# Altium PCB scm_temp_pcb(AD10).PcbDoc
Units mil, origin at the board's own origin, x right, y up, seen from the top; angles counter-clockwise.
Board outline 2362.2 x 677.17 mil, 2 copper layers (Top Layer, Bottom Layer); 37 components, 30 nets, 137 pads, 75 vias.
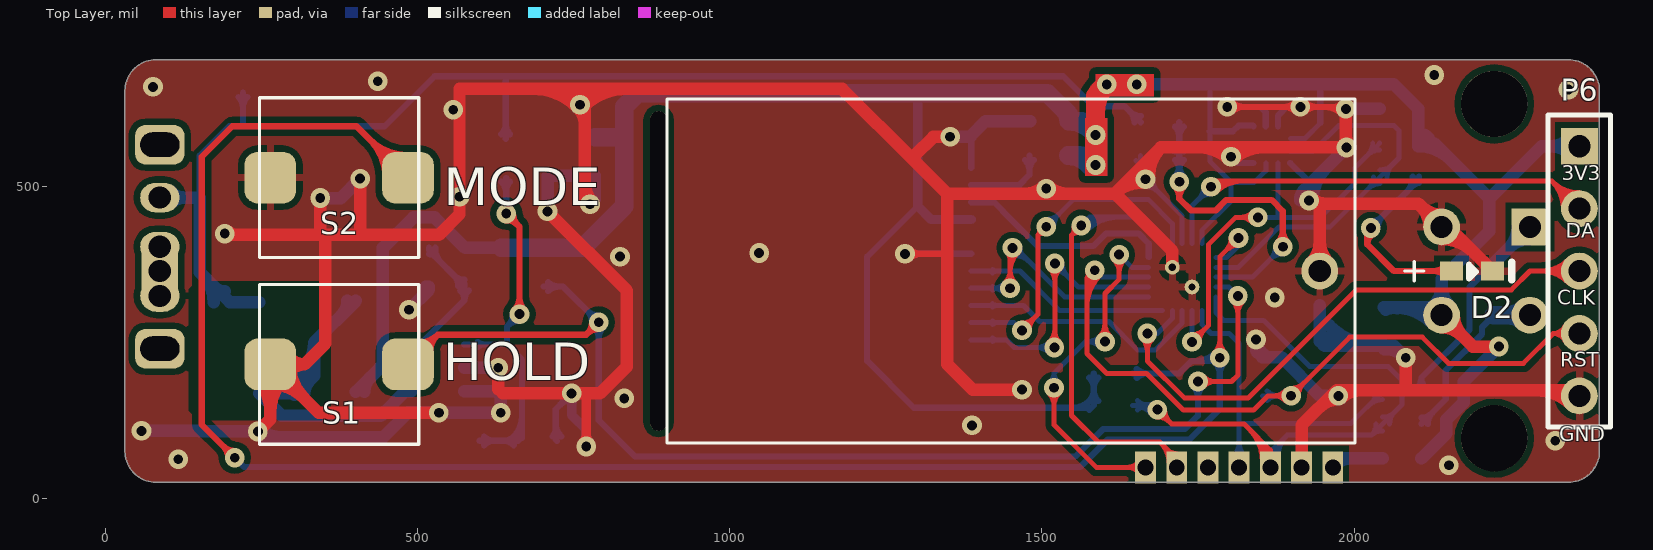
[diagram p0: Top Layer view]
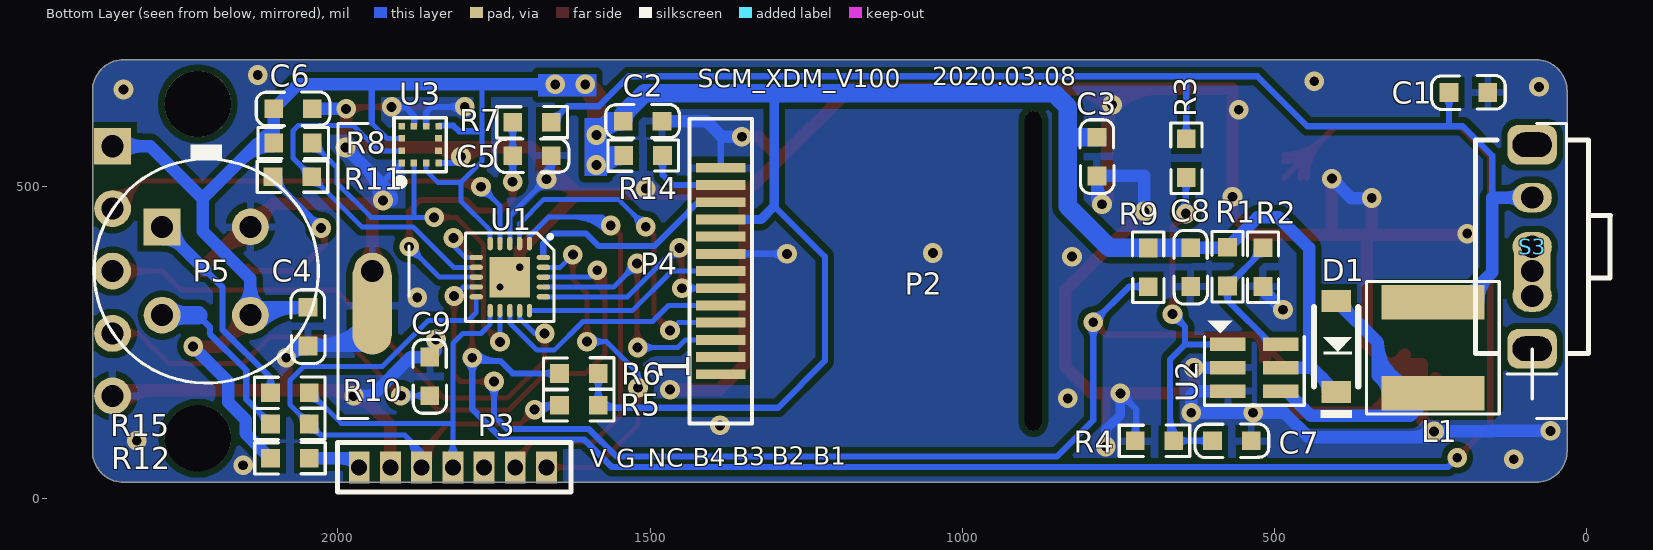
[diagram p1: Bottom Layer view, seen from below]

## Layer stack, top to bottom
Top Layer: signal copper 1.4
Dielectric: dielectric 12.6, FR-4, Dk 4.8
Bottom Layer: signal copper 1.4

## Board outline
31,75.42 ccw(c81,75.42) 81,25.42 2343.2,25.42 ccw(c2343.2,75.42) 2393.2,75.42 2393.2,652.58 ccw(c2343.2,652.58) 2343.2,702.58 81,702.58 ccw(c81,652.58) 31,652.58

## Design rules (kind name [scope] priority, off if disabled: settings)
Clearance ANTROOM [WithinRoom('ANT_ROOM') vs InNamedPolygon('TOP_GND')] p1: gap=15
Clearance ARC [ISARC] p2: gap=10
Clearance POLYGON_1 [InNamedPolygon('BOT_GND') Or  InNamedPolygon('TOP_GND')] p3: gap=10
Clearance PAD2PAD [ISPAD vs ISPAD] p4: gap=6
Clearance [All] p5: gap=7
ComponentClearance [All] p1 off: gap=10 collisioncheckmode=3 verticalgap=10 showdistances=FALSE
HoleSize [All] p1: absolutevalues=TRUE maxlimit=551.18 minlimit=1 maxpercent=80.000 minpercent=20.000
HoleToHoleClearance [All] p1 off: gap=10 allowstackedmicrovias=TRUE
MinimumSolderMaskSliver [All] p1 off: minsoldermaskwidth=10
PolygonConnect VIA [ISVIA] p1: connectstyle=Direct reliefconductorwidth=10 reliefentries=4 polygonreliefangle="90 Angle"
PolygonConnect [All] p2: connectstyle=Relief reliefconductorwidth=11.81 reliefentries=4 polygonreliefangle="90 Angle"
RoutingVias [All] p1: holewidth=11.81 width=23.62 viastyle="Through Hole" minholewidth=11.81 minwidth=23.62 maxholewidth=200 maxwidth=200
SilkToSilkClearance [All] p1 off: silktosilkclearance=10
SilkscreenOverComponentPads [IsPad] p1 off: minsilkscreentomaskgap=1
SolderMaskExpansion [All] p1: expansion=4
Width [All] p1: maxlimit=118.11 minlimit=7.87 preferedwidth=8
22 further rules are at their usual default settings.

## Components (designator, comment, footprint, x,y, rotation, side; value= is the part's Value field where it differs from the comment)
C1 "10uF/16V(X5R)" C0603 158,650 r0 bottom
C2 "10uF/16V(X5R)" C0603 1481,604 r0 bottom
C3 "10uF/16V(X5R)" C0603 784,516.31 r90 bottom
C4 "1uF/10V(X5R)" C0603 2048,306 r270 bottom
C5 "0.1uF/50V" C0603 1658.16,548.79 r0 bottom
C6 "1uF/16V/X7R" C0603 2041,623.84 r0 bottom
C7 "4.7uF/16V" C0603 537,92 r0 bottom
C8 "10uF/10V/X7R" C0603 634,339.17 r90 bottom
C9 "0.1uF/50V" C0603 1853,226.2 r270 bottom
D1 "1N5819HW" SOD-123 401,316.17 r270 bottom
D2 "LED_RED" D0603 2156,364 r0 top
L1 "SWPA5020S4R7MT(4.7uH)" SMD_L5X5 246,241.17 r270 bottom
P2 "Header 2" BAT_7S 1016,364 r0 bottom locked
P3 "PH1.27_1x7" PH1.27_7P 1666,49.59 r0 bottom
P4 "LCD" SMD_1X13_0.7 1386.75,364 r0 bottom locked
P5 "MLX90614" TO-39 2211,364 r180 bottom locked
P6 "PH2.54_1x5P" HDR1X5 2361,564 r270 top
R1 "1M" R0603 575,340 r90 bottom
R2 "680K" R0603 518,339.17 r90 bottom
R3 "10K" R0603 641,576 r270 bottom
R4 "510K" R0603 723,92 r180 bottom
R5 "10K" R0603 1583,148.94 r0 bottom
R6 "47K" R0603 1583,200 r0 bottom
R7 "1M" R0603 1720.16,602.27 r180 bottom
R8 "47K" R0603 2103,569 r180 bottom
R9 "47K" R0603 702,401 r270 bottom
R10 "33R" R0603 2046,169 r0 bottom
R11 "10K" R0603 2104,515 r180 bottom
R12 "120R" R0603 2108,64 r180 bottom
R14 "10R" R0603 1480,549 r0 bottom
R15 "33R" R0603 2046,119 r0 bottom
S1 "SW-PB" SMD_SW6X6- 374.19,214.39 r90 top locked
S2 "SW-PB" SMD_SW6X6- 374.19,513.61 r90 top locked
S3 "SK12D07VG3" SK12D07 86.87,403 r90 bottom
U1 "N76E003AQ20" QFN20 1724.75,354.25 r270 bottom
U2 "HX3002" SOT23-6 532,209 r270 bottom
U3 "NC" LGA-12 1898,537 r90 bottom

## Footprints (in the part's own frame and the unit in brackets; to place one, negate y for a bottom-side part, rotate by r counter-clockwise, add the part's x,y. Pads: shape width x height; smd on the part's side, far side on the other; paste and mask are expansions set on the pad)
BAT_7S [mm] "Connector; Header; 2 Position"
  rect 1.5x1.5 hole 0.9: 1(-23.6,0)
  round 1.5 hole 0.9: 2(23.6,0)
  silkscreen extent -25,-6 25,6
C0603 [mil]
  rect 30x30 smd: 1(0,0) 2(62,0)
  silkscreen extent -28,-27 90,27
D0603 [mil]
  rect 37x30 smd: 1(0,0) 2(66,0)
  silkscreen extent 28,-14 97,14
HDR1X5 [mm] "Connector; Header; 5 Position"
  rect 1.5x1.5 hole 0.9: 1(0,0)
  round 1.5 hole 0.9: 2(2.54,0) 3(5.08,0) 4(7.62,0) 5(10.16,0)
  silkscreen extent -1.27,-1.27 11.43,1.27
LGA-12 [mm]
  rect 0.275x0.265 smd mask+0.05: 1(0,0) 2(0,-0.5) 3(0,-1) 4(0,-1.5) 7(1.5,-1.502) 8(1.5,-1.002) 9(1.5,-0.502) 10(1.5,-0.002)
  rect 0.265x0.275 smd mask+0.05: 5(0.5,-1.5) 6(1,-1.5) 11(1,-0.002) 12(0.5,-0.002)
  silkscreen extent -0.86,-1.81 1.84,0.31
PH1.27_7P [mm]
  rect 0.85x1.3 hole 0.65: 1(0,0) 2(1.27,0) 3(2.54,0) 4(3.81,0) 5(5.08,0) 6(6.35,0) 7(7.62,0)
  silkscreen extent -1,-1 8.51,1
QFN20 [mm] "WFQFPN20,3x3mm"
  oval 0.55x0.22 smd mask+0.01: 1(-1.365,0.8) 2(-1.365,0.4) 3(-1.365,0) 4(-1.365,-0.4) 5(-1.365,-0.8) 11(1.365,-0.8) 12(1.365,-0.4) 13(1.365,0) 14(1.365,0.4) 15(1.365,0.8)
  oval 0.22x0.55 smd mask+0.01: 6(-0.8,-1.365) 7(-0.4,-1.365) 8(0,-1.365) 9(0.4,-1.365) 10(0.8,-1.365) 16(0.8,1.365) 17(0.4,1.365) 18(0,1.365) 19(-0.4,1.365) 20(-0.8,1.365)
  round 0.6 hole 0.3: P(-0.4,0.4) P(0.4,-0.4)
  rect 1.65x1.65 smd paste+0 mask+0.05: P(0,0)
  silkscreen extent -1.8,-1.8 1.8,1.8
R0603 [mil]
  rect 30x30 smd: 1(0,0) 2(62,0)
  silkscreen extent -25,-25 88,25
SK12D07 [mm]
  oval 1.3x1.6 hole 0.9: 1(-2,0)
  oval 1.2x1.6 hole 0.9: 2(0,0) 3(2,0)
  rrect50% 1.6x2 hole 1 slot 1.6 at 90 deg: S1(-4.15,0) S2(4.15,0)
  silkscreen extent -4.35,-3.19 4.35,2.3
SMD_1X13_0.7 [mm]
  rect 2x0.4 smd paste+0 mask+0.05: 1(0,4.2) 2(0,3.5) 3(0,2.8) 4(0,2.1) 5(0,1.4) 6(0,0.7) 7(0,0) 8(0,-0.7) 9(0,-1.4) 10(0,-2.1) 11(0,-2.8) 12(0,-3.5) 13(0,-4.2)
  silkscreen extent -1.27,-6.2 1.27,6.2
SMD_L5X5 [mm]
  rect 1.4x4.2 smd: 1(-1.85,0) 2(1.85,0)
  silkscreen extent -2.7,-2.7 2.7,2.7
SMD_SW6X6- [mm]
  rrect50% 2.1x2.1 smd: 1(0,2.8) 2(0,-2.8)
  silkscreen extent -3.25,-3.24 3.25,3.24
SOD-123 [mm] "SOD123"
  rect 0.9x1.2 smd: 1(0,0) 2(3.7,0)
  silkscreen extent 0.26,-0.9 4.77,0.9
SOT23-6 [mm] "SOT-23/SC-74A; 5 Leads; Body 3.1 x 3 mm, inc. leads (LxW max)"
  rect 0.55x1.45 smd: 1(-0.95,-1.075) 2(0,-1.075) 3(0.95,-1.075) 4(0.95,1.075) 5(0,1.075) 6(-0.95,1.075)
  silkscreen extent -1.91,-2.03 1.52,2.03
TO-39 [mm] "Connector; Header; 2 Position"
  rect 1.5x1.5 hole 0.9: 1(-1.796,1.796)
  round 1.5 hole 0.9: 2(-1.796,-1.796) 3(1.796,-1.796) 4(1.796,1.796)
  silkscreen extent -4.56,-4.56 4.56,5.08

## Part data
C1 C2 C3 C4 C5 C9: library part Cap, "Capacitor"
C6 C7 C8: library part "Cap 1206", "Capacitor 1206"
D1: library part "D Schottky", "DIODES SOD-123"
D2: library part LED3
L1: library part Inductor, "Inductor"
P2: "Header, 2-Pin"
P3: library part "Header 7", "Header, 7-Pin"
P4: library part "Header 13", "Header, 13-Pin"
P5: library part "Header 4", "Header, 4-Pin"
P6: library part "Header 5", "Header, 5-Pin"
R1 R2 R3 R4 R5 R6 R7 R8 R9 R10 R11 R12 R14 R15: library part Res2, "Resistor"
S1 S2: "Switch"
S3: library part SW-SPDT, "SPDT Subminiature Toggle Switch, Right Angle Mounting, Vertical Actuation"
U3: library part CC101

## Free pads (board coordinates)
  oval 27.56x511.81 hole 27.56 slot 511.81 at 90 deg unplated: 0(886,364)
  round 106.3 hole 106.3: 0(2224.58,96.28) 0(2224.58,631.72)
  oval 62.99x157.48 smd far side: 1(1945.13,308.88)

## Via types
v1: diameter 31.5, hole 15.75, Top Layer to Bottom Layer, tented both sides, 75 vias

## Nets (pads, with @x,y where several pads share a name; then routed paths per layer and width w, separated by ;. In a path a pad name is that pad's centre, name@x,y a point inside that pad or via, vN(x,y) a via of type N, cw(c..) or ccw(c..) an arc to the next point about the centre after c; other vN are vias at no path point)
3V0: C2.2 C3.2 C4.1 C6.2 C8.2 D1.2 P4.10 P5.3 P6.1 R1.2 R5.1 R6.1 R8.1 R9.1 R12.1 R14.2 U1.5 U2.5 U3.3 U3.7 U3.11 | length 5779.4
  Top Layer w20: P5.3@2140.29,273.76 cw(c2140.29,226.62) 2173.62,259.95 cw(c2206.96,293.29) P5.3@2159.82,293.29 ; P5.3 2190.58,243 v1(2232,243)
  Top Layer w30: v1(1586,582) 1586,645 v1(1604,663) ; 1586,617.74 cw(c1649.26,617.74) v1@1604.53,662.47 ; 1586,637.54 cw(c1611.91,637.54) v1@1604.22,662.29
  Bottom Layer w8: U1.5 1756.24,429.24 1803,476 1803,506 ; 1769,663 1769,588 1769,540 1803,506 ; U3.3 1858.63,524.63 1840,506 1803,506 ; U3.11 1921.37,576.37 1946,601
  Bottom Layer w10: 1301,468 1220,387 1220,220 1295,145 R5.1@1579,145 ; 1549.34,145 ccw(c1549.34,182.6) 1575.93,156.01 ccw(c1558.86,173.08) 1583,173.08 ccw(c1607.14,173.08) R5.1@1590.07,156.01 ; R5.1@1568.38,145 cw(c1568.38,134.32) R5.1@1575.93,141.87 ; R6.1@1575.93,192.93 cw(c1558.86,175.86) 1583,175.86 cw(c1607.14,175.86) R6.1@1590.07,192.93 ; R5.1 R6.1 ; 1769,588 1806,588 1815.03,597.03 1837.9,597.03 U3.7 ; 1946,601 1946,663
  Bottom Layer w15: 1301,649 1301,468 1322.32,446.68 P4.10
  Bottom Layer w20: D1.2 439.5,209 ; D1.2@414.62,170.5 cw(c447.51,170.5) 424.25,193.75 ; U2.5 439.5,209 ; C8.2 575.83,401.17 R1.2 527,450 493,450 444.13,401.13 444.13,213.63 439.5,209 ; v1(1652,663) 1769,663 1946,663 2063.84,663 C6.2 R8.1 2128,569 2217,480 ; C4.1 P5.3@2127.58,306 ; C4.1@2050.5,301.67 cw(c2062.92,280.15) 2069.36,304.15 ; C4.1@2062.46,306 cw(c2062.46,215.46) P5.3@2126.48,279.48 ; R8.1@2103,564 cw(c2103,491.57) 2154.21,542.79 ; 2103,584 cw(c2103,559.86) 2120.07,576.93 ; R12.1 2148,104 2148,126 2176,154 2176,187 v1(2232,243) ; 2110.74,306 cw(c2110.74,263.74) P5.3@2140.62,293.62 ; P5.3@2126.48,307.1 ccw(c2093.15,340.43) 2140.29,340.43 ccw(c2187.43,340.43) P5.3@2154.1,307.1 ; P5.3 2140.29,351.29 2217,428 2217,480 ; P6.1@2347.19,550.19 ccw(c2313.86,516.86) 2313.86,564 ccw(c2313.86,611.14) P6.1@2347.19,577.81 ; P6.1 2301,564 2217,480
  Bottom Layer w30: C8.2 764.17,401.17 831,468 831,627.18 852.82,649 1301,649 1509,649 1543,615 C2.2 ; C3.2 830.31,578.31 ; 1535.22,622.78 cw(c1516.44,604) C2.2 ; R14.2@1547.98,549 cw(c1547.98,495.98) v1@1585.47,533.47 ; 1565.77,543.13 ccw(c1586,563.35) v1@1586,534.75 ; v1@1572.56,536.34 ccw(c1542,505.79) R14.2 1559.9,549 ; v1@1578.85,589.15 ccw(c1543,553.3) C2.2 ; v1@1585.34,533.65 ccw(c1559.9,520.25) 1559.9,549 ; v1(1586,534) 1574.9,534 1559.9,549 ; v1(1586,582) 1564,604 C2.2
BAT+: P2.1 S3.1 S3.2 | length 260.2
  Bottom Layer w20: P2.1@73.06,350.19 cw(c39.72,316.86) 86.87,316.86 cw(c134.01,316.86) P2.1@100.67,350.19 ; P2.1@75.84,335.28 ccw(c49.23,361.9) 86.87,361.9 ccw(c124.51,361.9) P2.1@97.89,335.28 ; P2.1@77.23,393.37 cw(c53.98,370.11) 86.87,370.11 cw(c119.75,370.11) P2.1@96.5,393.37 ; P2.1@86.87,389 P2.1 86.87,315 S3.1@87.87,314
BAT_ADC: C5.2 R7.1 U1.8 | length 774.9
  Top Layer w10: v1@1712.56,499.56 cw(c1694.21,481.21) 1720.16,481.21 cw(c1746.11,481.21) v1@1727.76,499.56 ; v1(1720.16,507.16) 1720.16,479.84 1739,461 1778.5,461 1795.5,478 1868,478 1886,460 v1@1886,404 ; v1@1878.4,410.6 ccw(c1860.05,428.95) 1886,428.95 ccw(c1911.95,428.95) v1@1893.6,410.6
  Bottom Layer w8: U1.8 1837.25,354.25 v1(1886,403) ; v1@1874.25,403 cw(c1845.89,403) 1865.94,382.94 cw(c1886,362.89) v1@1886,391.25
  Bottom Layer w10: v1@1712.56,514.76 ccw(c1694.21,533.11) 1720.16,533.11 ccw(c1746.11,533.11) v1@1727.76,514.76 ; C5.2@1713.09,541.72 cw(c1696.02,524.65) 1720.16,524.65 cw(c1744.3,524.65) C5.2@1727.23,541.72 ; C5.2@1713.09,555.86 ccw(c1696.02,572.93) 1720.16,572.93 ccw(c1744.3,572.93) C5.2@1727.23,555.86 ; R7.1@1713.09,595.2 cw(c1696.02,578.13) 1720.16,578.13 cw(c1744.3,578.13) R7.1@1727.23,595.2 ; v1(1720.16,507.16) C5.2 R7.1
CS: P4.7 U1.15 | length 347.5
  Bottom Layer w8: P4.7 1465,364 1528.49,300.51 U1.15 ; P4.7@1420.98,361.26 cw(c1427.6,354.65) 1427.6,364 cw(c1427.6,373.35) P4.7@1420.98,366.74
CX: R11.2 U1.7 U3.12 | length 687.5
  Bottom Layer w8: U1.7 1815,370 1879.71,434.71 1961.71,434.71 R11.2 2072,545 2072,589 2064,597 1975,597 1934.69,556.68 U3.12 ; R11.2@2031,515 cw(c2004.44,515) 2023.22,496.22 cw(c2042,477.44) R11.2@2042,504 ; R11.2@2042,526 ccw(c2042,552.56) 2060.78,533.78 ccw(c2079.56,515) R11.2@2053,515
DX: R8.2 U1.12 U3.2 | length 791.6
  Top Layer w7.87: v1(1740.5,250.5) 1767,277 1767,406.74 1810.26,450 v1(1845.95,450) ; v1@1740.5,262.31 ccw(c1740.5,290.82) 1760.66,270.66 ccw(c1780.82,250.5) v1@1752.31,250.5 ; v1@1837.6,441.65 ccw(c1817.44,421.49) 1817.44,450 ccw(c1817.44,478.51) v1@1837.6,458.35
  Bottom Layer w7.87: v1(1740.5,250.5) U1.12 ; v1(1845.95,450) 1878.31,450 ; U3.2 1878.31,450 ; R8.2@2029.94,569 cw(c2003.23,569) 2022.11,550.11 cw(c2041,531.23) R8.2@2041,557.94 ; R8.2 2001.5,529.5 2001.5,504.5 1947,450 1878.31,450
GND: C1.1 C2.1 C3.1 C4.2 C5.1 C6.1 C7.1 C8.1 C9.1 D2.2 P2.2 P3.6 P4.8 P4.13 P5.4 P6.5 pad.1 R2.1 R4.1 S1.1 S2.1 U1.3 U1.P U2.2 U2.3 U3.1 U3.4 U3.8 U3.9 | length 10612.3
  Top Layer w10: v1(1280.56,391.56) 1346.56,391.56 ; v1@1288.16,383.96 cw(c1306.51,365.61) 1306.51,391.56 cw(c1306.51,417.51) v1@1288.16,399.16 ; v1(1797,627) v1(1914,627) v1@1983.84,627 ; v1@1804.6,619.4 cw(c1822.95,601.05) 1822.95,627 cw(c1822.95,652.95) v1@1804.6,634.6 ; v1@1906.4,619.4 ccw(c1888.05,601.05) 1888.05,627 ccw(c1888.05,652.95) v1@1906.4,634.6 ; v1@1921.6,619.4 cw(c1939.95,601.05) 1939.95,627 cw(c1939.95,652.95) v1@1921.6,634.6 ; 1953.43,627 cw(c1953.43,590.27) v1@1979.4,616.24 ; 1968.67,627 ccw(c1968.67,642.17) v1@1979.4,631.44
  Top Layer w15: v1@764.17,88.83 ccw(c750.09,102.91) 770,102.91 ccw(c789.91,102.91) v1@775.83,88.83 ; v1(770,83) 770,166
  Top Layer w20: v1@193,422 352,422 ; v1@195.06,428.06 ccw(c209.71,442.71) 209.71,422 ; S1.1@241.79,192.23 cw(c188.29,138.74) 263.95,138.74 cw(c339.61,138.74) S1.1@286.11,192.23 ; v1(244,107) 263.95,126.95 S1.1 ; S1.1@263.95,183.06 cw(c263.95,107.4) 317.45,160.9 cw(c370.95,214.39) S1.1@295.29,214.39 ; S1.1@291.05,198.66 cw(c318.39,182.78) 318.39,214.39 ; S1.1@291.05,230.13 ccw(c318.39,246.01) 318.39,214.39 ; 344,423 v1(344,481) ; 407.83,422.83 v1(407.83,512) ; v1(534,137) 341.35,137 S1.1 ; 567,655 v1(567,483) 567,455 534,422 352,422 ; 567,656 1180,656 1296,540 ; 629,175 v1(629,209) ; 636,168 v1(746.59,168) 792,168 835,211 835,332.52 v1(708,459.52) ; 684.56,656 cw(c684.56,555.06) 755.94,626.44 cw(c726.81,597.31) 768,597.31 ; 732.84,656 cw(c732.84,603.34) v1@770.08,640.58 ; v1@749.92,640.58 cw(c787.16,603.34) 787.16,656 ; v1@757.01,635.41 ccw(c745.05,655) 768,655 v1@768,479 ; v1@764.06,626.44 cw(c835.44,555.06) 835.44,656 ; 768,504.19 ccw(c809.19,504.19) v1@780.06,475.06 ; v1(1353,579) 1326,579 1296,549 1296,540 ; v1(1468,174) 1389,174 1348,215 1348,488 ; 1473.85,488 ccw(c1473.85,529.19) v1@1502.98,500.06 ; v1@1511.11,500.06 ccw(c1540.24,529.19) 1540.24,488 ; 1646.47,517.72 cw(c1664.8,499.39) v1@1667.46,525.18 ; v1@1651.78,510.05 cw(c1678.59,511.84) 1659.59,530.84 ; v1@1665.41,505.28 ccw(c1659.24,445.52) 1616.75,488 ; v1@1671.74,511.38 cw(c1737,515.75) 1690.75,562 ; U1.P@1709,370 1709,395.75 1616.75,488 ; 1752.91,562 cw(c1752.91,496.91) v1@1798.94,542.94 ; v1@1807.06,542.94 cw(c1853.09,496.91) 1853.09,562 ; P3.6 1916,117 1972,173 2352,173 P6.5 ; P2.2@1931.33,377.81 ccw(c1897.99,411.14) 1945.13,411.14 ccw(c1992.28,411.14) P2.2@1958.94,377.81 ; v1@1932.06,481.06 ccw(c1953.95,502.95) 1953.95,472 ; v1@1933.18,479.5 ccw(c1945.13,485.28) 1945.13,472 ; 1944.7,145.7 cw(c1975,115.4) v1@1975,158.25 ; P2.2 1945.13,472 ; v1@1979.06,159.94 cw(c2010.6,128.4) 2010.6,173 ; v1@1987,563 v1(1987,623.84) ; 1987,578.29 ccw(c2004.29,578.29) v1@1992.06,566.06 ; v1(1988,562) 1690.75,562 ; 2083,174 v1(2083,225) ; P5.4@2120.76,434.71 ccw(c2073.62,434.71) 2106.95,468.05 ccw(c2140.29,501.38) P5.4@2140.29,454.24 ; P5.4@2140.29,415.18 cw(c2140.29,341.48) 2192.4,393.6 ; P5.4 2103,472 1945.13,472 ; P5.4@2151.29,434.71 D2.2 ; D2.2@2207.49,378.51 cw(c2192.98,364) D2.2@2213.5,364 ; 2292.13,173 cw(c2292.13,95.13) P6.5@2347.19,150.19 ; S1.1 318.39,214.39 ; 318.39,214.39 352,248 352,422 ; 1296,540 1348,488 ; 1348,488 1616.75,488 ; 1616.75,488 1690.75,562
  Bottom Layer w8: C5.1@1650.38,541.01 cw(c1631.6,522.23) 1658.16,522.23 cw(c1684.71,522.23) C5.1@1665.94,541.01 ; v1@1655.83,516.87 ccw(c1645.07,523.09) 1657.07,526.3 ; 1656.89,526.98 ccw(c1675.5,531.97) v1@1667.55,514.41 ; 1658.16,533.36 ccw(c1681.76,533.36) v1@1668.16,514.06 ; v1@1666,499.25 cw(c1666,470.89) 1686.06,490.94 cw(c1706.11,511) v1@1677.75,511 ; v1@1672.77,520.6 cw(c1692.65,548.79) C5.1 1658.16,518.84 v1(1666,511) 1724.75,452.25 U1.3
  Bottom Layer w10: R4.1@715.93,99.07 ccw(c703.69,111.31) 721,111.31 ; 721,120.97 ccw(c751.97,120.97) R4.1@730.07,99.07 ; R4.1 721,94 721,142.41 v1(746.59,168) ; v1@735.84,168 cw(c709.89,168) 728.24,149.65 cw(c746.59,131.3) v1@746.59,157.25 ; v1(1280.56,391.56) P4.8 ; v1@1288.16,383.96 cw(c1306.51,365.61) 1306.51,391.56 cw(c1306.51,417.51) v1@1288.16,399.16 ; P4.13 1386.75,580.75 ; v1(1797,627) 1850,627 1858.56,618.44 U3.8 ; v1@1804.6,619.4 cw(c1822.95,601.05) 1822.95,627 cw(c1822.95,652.95) v1@1804.6,634.6 ; v1@1813,537 U3.4 ; U3.9 1878.24,613 1892.24,627 ; U3.1 1928,507 1928,502 ; v1@1905.46,620.47 ccw(c1892.24,610.35) 1892.24,627 ; v1@1905.46,633.53 cw(c1892.24,643.65) 1892.24,627 ; v1(1914,627) 1892.24,627
  Bottom Layer w15: v1@740.76,162.17 cw(c726.68,148.09) 746.59,148.09 cw(c766.5,148.09) v1@752.42,162.17 ; v1(746.59,168) 746.59,133.41 770,110 v1(770,83) ; v1@764.17,88.83 ccw(c750.09,102.91) 770,102.91 ccw(c789.91,102.91) v1@775.83,88.83
  Bottom Layer w20: v1(57.66,108) 150.03,108 151.03,107 v1(244,107) ; v1@248.06,111.06 ccw(c279.6,142.6) 279.6,98 ; v1@253,98 445.18,98 484.18,137 v1(534,137) v1(633,137) 633,165 626.4,171.6 U2.3 ; v1(344,481) 376.83,481 v1(407.83,512) ; v1(486,302) 518,334 R2.1 ; 505.81,321.81 ccw(c488.46,339.17) R2.1@513,339.17 ; U2.2 v1(629,209) ; v1(708,459.52) 708,514.31 ; 708,516.31 C3.1 v1@784,479 ; v1@771.94,475.06 ccw(c742.81,504.19) C3.1@784,504.19 ; v1(1353,579) 1385,579 1386.75,580.75 1410,604 C2.1 ; v1@1848.25,251.86 ccw(c1869.28,242.49) C9.1 ; C9.1@1855.77,230.37 cw(c1871.63,254.2) v1(1843,254.2) 1843,236.2 C9.1 ; v1@1913.75,477 cw(c1939.7,477) 1921.35,495.35 ; v1(1928,477) 1928,502 v1(1988,562) ; v1@1933.75,477 cw(c2007.98,477) 1955.49,529.49 ; pad.1 1945.13,251.87 1953,244 C4.2 2064,244 v1(2083,225) ccw(c2049.17,191.18) C4.2@2048.11,239 ; pad.1@1946.19,262.7 ccw(c1991.33,307.83) 1991.33,244 ; pad.1@1960.33,276.84 ccw(c2039.61,356.12) C4.2@2039.61,244 ; v1(1975,164) 1945.72,164 1883.52,226.2 C9.1 ; v1(1987,623.84) C6.1 ; 2030.72,246.38 ccw(c2035.76,265.2) C4.2@2045.5,248.33
  other v1: 2152,53 116.46,62.36 2322.33,92 1388,116.8 831,160 1873,321.59 824,387.16 1047,393 191,424 776,471 1507.05,496 1803,547 557,622.48 760,630.5 2343.71,654.75 76,659 436,668 2128.4,678
ICPCLK: P6.3 U1.14 | length 1115.4
  Top Layer w8: v1@1660.69,255.69 cw(c1640.64,235.64) 1669,235.64 cw(c1697.36,235.64) v1@1677.31,255.69 ; v1(1669,264) 1669,220 1728.75,160.25 1830.25,160.25 2004,334 2252,334 2282,364 P6.3 ; P6.3@2342.95,345.95 ccw(c2299.37,302.37) 2299.37,364 ccw(c2299.37,425.63) P6.3@2342.95,382.05 ; P6.3@2348.61,351.61 ccw(c2318.68,321.68) 2318.68,364 ccw(c2318.68,406.32) P6.3@2348.61,376.39
  Bottom Layer w8: v1(1669,264) 1684.92,264 1709,288.08 U1.14
ICPDA: P6.2 U1.4 | length 1001.1
  Top Layer w8: v1(1771,499) 1780,508 2317,508 P6.2 ; v1@1773.65,496.35 cw(c1801.78,468.22) 1801.78,508 ; v1@1779.31,490.69 cw(c1821.09,448.91) 1821.09,508 ; P6.2@2335.47,464 ccw(c2273.84,464) 2317.42,507.58 ccw(c2361,551.16) P6.2@2361,489.53 ; P6.2@2343.47,464 ccw(c2301.16,464) 2331.08,493.92 ccw(c2361,523.84) P6.2@2361,481.53
  Bottom Layer w8: U1.4 1740.5,468.5 v1(1771,499) ; v1@1759.25,499 cw(c1730.89,499) 1750.94,478.94 cw(c1771,458.89) v1@1771,487.25
KEY1: R9.2 S1.2 U1.9 | length 2348.6
  Top Layer w8: v1(1750,187) 1803.8,187 1814,197.2 v1(1814,324) ; v1@1758.31,178.69 cw(c1778.36,158.64) 1778.36,187 cw(c1778.36,215.36) v1@1758.31,195.31 ; v1@1805.69,315.69 cw(c1785.64,295.64) 1814,295.64 cw(c1842.36,295.64) v1@1822.31,315.69
  Top Layer w10: S1.2 532.03,262 ; S1.2@489.77,240.18 ccw(c496.28,271.55) 518.93,248.9 ccw(c541.58,226.25) S1.2@510.21,219.74 ; S1.2@491.81,249.98 ccw(c500.78,293.25) 532.03,262 ; S1.2@520.01,221.77 cw(c563.28,230.75) 532.03,262 ; v1@779.25,282 cw(c753.3,282) 771.65,263.65 cw(c790,245.3) v1@790,271.25 ; v1(790,282) 770,262 532.03,262
  Bottom Layer w8: U1.9 1799.5,338.5 v1(1814,324)
  Bottom Layer w10: R9.2@702,339.17 732.83,339.17 v1(790,282) ; R9.2@709.07,331.93 cw(c726.54,314.46) 726.54,339.17 ; R9.2@709.07,346.07 ccw(c725.74,362.74) 725.74,339.17 ; v1@779.25,282 ccw(c753.3,282) 771.65,300.35 ccw(c790,318.7) v1@790,292.75 ; v1@782.4,274.4 cw(c764.05,256.05) 790,256.05 cw(c815.95,256.05) v1@797.6,274.4 ; v1@784.9,272.54 cw(c780.3,264) 790,264 ; v1@795.1,272.54 ccw(c799.7,264) 790,264 ; v1@1742.4,179.4 cw(c1724.05,161.05) 1750,161.05 cw(c1775.95,161.05) v1@1757.6,179.4 ; v1(1750,187) 1750,132 1729,111 1598,111 1554,67 848,67 790,125 790,264
LED_A: P4.12 R14.1 | length 168.9
  Bottom Layer w10: P4.12 1463.8,501.8 1480,518 R14.1 ; R14.1@1472.93,541.93 cw(c1455.86,524.86) 1480,524.86 cw(c1504.14,524.86) R14.1@1487.07,541.93
LED_K_PWM: P4.11 U1.20 | length 351.1
  Bottom Layer w8: U1.20 U1.20@1671.01,386.33
  Bottom Layer w10: P4.11 1423.4,474.24 1438.12,459.52 1438.12,458.88 1493,404 1582.5,404 1602.75,424.25 1654.75,424.25 1671.01,407.99 U1.20@1671.01,386.33
MLX_SCL: P5.1 R10.2 | length 449.3
  Bottom Layer w10: R10.2@2100.96,176.1 ccw(c2084.2,193) 2108,193 ; R10.2 2108,193 ; R10.2@2115.04,176.1 cw(c2131.8,193) 2108,193 ; 2213,366 2185,338 2185,270 2108,193
  Bottom Layer w20: 2213,366 P5.1 ; P5.1@2262.18,434.71 cw(c2215.04,434.71) 2248.37,401.38 cw(c2281.71,368.04) P5.1@2281.71,415.18
MLX_SDA: P5.2 R15.2 | length 373.1
  Bottom Layer w10: R15.2 2108,119.58 2147,158.58 2147,205 2205,263 2205,274.29 2224,293.29 ; R15.2@2108,129 ccw(c2108,151.74) 2124.08,135.66 ; R15.2@2118,119 cw(c2143.54,119) 2125.48,137.06
  Bottom Layer w30: 2224,293.29 P5.2 ; P5.2@2271.44,283.02 ccw(c2246.64,258.22) 2246.64,293.29 ccw(c2246.64,328.36) P5.2@2271.44,303.56
MODE_KEY: R6.2 S2.2 U1.6 | length 3493.5
  Top Layer w8: v1@1776.69,233.31 ccw(c1756.64,253.36) 1785,253.36 ccw(c1813.36,253.36) v1@1793.31,233.31 ; v1@1780,220 v1(1785,225) 1785,387 v1(1815,417) ; v1@1803.25,417 cw(c1774.89,417) 1794.94,396.94 cw(c1815,376.89) v1@1815,405.25
  Top Layer w10: v1@196.25,65 ccw(c170.3,65) 188.65,83.35 ccw(c207,101.7) v1@207,75.75 ; v1(207,65) 154,118 154,547 203,596 402.03,596 S2.2 ; S2.2@448.09,513.61 ccw(c360.36,513.61) 422.39,575.64 ccw(c484.43,637.67) S2.2@484.43,549.94 ; S2.2@458.09,513.61 ccw(c394.5,513.61) 439.46,558.57 ccw(c484.43,603.53) S2.2@484.43,539.94
  Bottom Layer w8: U1.6 1796,385.75 1815,404.75 v1(1815,417) ; v1(1785,225) v1@1786,226
  Bottom Layer w10: v1(207,65) 222,50 1561.04,50 1605.04,94 1736.04,94 1785,142.96 v1(1785,225) 1780,220 1740,220 1720,200 R6.2 ; R6.2@1652.07,192.93 cw(c1669.14,175.86) 1669.14,200 cw(c1669.14,224.14) R6.2@1652.07,207.07 ; 1746.98,220 ccw(c1746.98,263.02) v1@1777.4,232.6 ; v1@1777.4,217.4 cw(c1759.05,199.05) 1785,199.05 cw(c1810.95,199.05) v1@1792.6,217.4
NetC7_2: C7.2 R3.2 R4.2 U2.1 | length 923.6
  Top Layer w10: v1@642,445.25 cw(c642,419.3) 660.35,437.65 cw(c678.7,456) v1@652.75,456 ; v1(642,456) 663,435 v1(663,295) ; v1@655.4,302.6 ccw(c637.05,320.95) 663,320.95 ccw(c688.95,320.95) v1@670.6,302.6
  Bottom Layer w10: U2.1 643,246.4 ; U2.1@596.16,242.28 cw(c606.11,232.33) 606.11,246.4 cw(c606.11,260.47) U2.1@596.16,250.52 ; C7.2 R4.2 ccw(c646.51,106.49) R4.2@667,106.49 ; C7.2@606.07,84.93 cw(c623.14,67.86) 623.14,92 cw(c623.14,116.14) C7.2@606.07,99.07 ; R3.2@633.93,506.93 cw(c614.44,487.44) 642,487.44 ; v1@634.4,463.6 ccw(c616.05,481.95) 642,481.95 ccw(c667.95,481.95) v1@649.6,463.6 ; v1(642,456) R3.2@642,513 ; 642,492.27 cw(c662.73,492.27) R3.2@648.07,506.93 ; v1@652.25,295 cw(c626.3,295) 644.65,276.65 cw(c663,258.3) v1@663,284.25 ; R4.2@653.93,84.93 ccw(c636.86,67.86) 636.86,92 ccw(c636.86,116.14) 653.93,99.07 ccw(c622.37,130.63) 667,130.63 ; v1(663,295) 643,275 643,246.4 ; R4.2@667,97 667,222.4 643,246.4
NetD1_1: D1.1 L1.2 U2.4 | length 749.2
  Bottom Layer w20: L1.2@293.4,184.1 ccw(c261.57,249.16) 334,249.16 ; L1.2@302.19,166.14 ccw(c277.25,217.11) 334,217.11 ; L1.2@303.5,185.73 ccw(c308.4,221.6) 334,196 ; L1.2@318.68,168.33 cw(c348.48,168.33) L1.2@327.41,189.41 ; 377.75,292.91 ccw(c354.49,316.17) D1.1@387.38,316.17 ; D1.1 334,249.17 ; U2.4 480.6,171.6 441,132 282.33,132 L1.2 306.33,168.33 334,196 ; 334,196 334,249.17
NetD2_1: D2.1 R11.1 | length 432.5
  Top Layer w10: 2021,406.32 cw(c2039.88,406.32) v1@2031.67,423.32 ; v1@2021,435 2021,407 2064,364 D2.1 ; D2.1@2145.43,356.93 ccw(c2128.36,339.86) 2128.36,364 ccw(c2128.36,388.14) D2.1@2145.43,371.07
  Bottom Layer w10: v1(2027,433) 2104,510 R11.1 ; v1@2027,443.75 ccw(c2027,469.7) 2045.35,451.35 ccw(c2063.7,433) v1@2037.75,433 ; 2083.39,489.39 ccw(c2057.79,515) R11.1@2094,515 ; R11.1@2095.46,501.46 cw(c2104,492.93) R11.1@2104,505
NetP3_7: P3.7 R12.2 | length 113.6
  Bottom Layer w20: P3.7 1980.41,64 R12.2 ; P3.7@1970.76,53.69 cw(c1995.65,28.79) 1995.65,64
NetR1_1: R1.1 R2.2 U2.6 | length 354.3
  Bottom Layer w10: U2.6 504.4,246.4 575,317 ; U2.6@513.22,246.4 cw(c534.51,246.4) 519.46,261.46 ; R2.2@518,391.17 cw(c518,377.08) R2.2@527.96,387.04 ; R2.2 518,397 R1.1 ; R2.2@528,401.17 ccw(c562.2,401.17) 538.02,376.98 ; R1.1@565,340 ccw(c540.86,340) 557.93,357.07 ccw(c575,374.14) R1.1@575,350 ; R1.1@568.18,332.69 cw(c553.55,317) 575,317 ; R1.1@575,344.17 R1.1 ; R1.1@581.82,332.69 ccw(c596.45,317) 575,317 ; 575,317 R1.1
RES: P4.6 U1.16 | length 606
  Top Layer w8: v1@1440.69,344.75 ccw(c1420.64,364.8) 1449,364.8 ccw(c1477.36,364.8) v1@1457.31,344.75 ; v1@1444.69,392.86 cw(c1434.29,382.46) 1449,382.46 cw(c1471.71,382.46) v1@1455.65,398.52 ; v1(1449,336.44) 1449,397.17 v1(1453,401.17) ; 1449,363.15 cw(c1491.02,363.15) v1@1461.31,392.86
  Bottom Layer w8: P4.6 v1(1449,336.44) ; P4.6@1420.98,333.7 cw(c1427.6,327.09) 1427.6,336.44 cw(c1427.6,345.79) P4.6@1420.98,339.18 ; v1@1440.69,328.13 ccw(c1420.64,308.08) 1420.64,336.44 ccw(c1420.64,364.8) v1@1440.69,344.75 ; v1@1453,389.42 cw(c1453,349.58) 1481.17,377.75 ; v1@1453,397.42 cw(c1453,376.89) 1467.52,391.4 ; v1(1453,401.17) 1457.76,401.17 1536.16,322.76 U1.16 ; v1@1464.75,401.17 ccw(c1481.63,401.17) 1469.69,389.23
RESET: C9.2 P6.4 U1.18 | length 1553
  Top Layer w8: 1572,306.11 cw(c1643.89,306.11) v1@1593.06,356.94 ; 1572,325.43 cw(c1624.57,325.43) v1@1587.4,362.6 ; 1572,344.74 cw(c1605.26,344.74) v1@1581.74,368.26 ; v1@1573.79,361.01 cw(c1566.37,358.13) 1572,352.5 ; v1@1580.5,354.3 ccw(c1577.63,346.88) 1572,352.5 ; v1(1584.75,365.25) 1572,352.5 ; v1@1890.9,155.9 ccw(c1870.84,135.84) 1870.84,164.2 ccw(c1870.84,192.57) v1@1890.9,172.51 ; v1@1899.2,175.95 ccw(c1899.2,204.32) 1919.26,184.26 ccw(c1939.31,164.2) v1@1910.95,164.2 ; P6.4@2338.34,252.25 ccw(c2319,242.22) 2319,264 ; P6.4@2338.34,275.75 cw(c2319,285.78) 2319,264 ; P6.4 2319,264 ; 1572,352.5 1572,232 1604,200 1667.79,200 1726.79,141 1839,141 1862.2,164.2 v1(1899.2,164.2) 1993,258 2109.5,258 2151.24,216.25 2271.25,216.25 2319,264
  Bottom Layer w8: v1(1584.75,365.25) 1595.75,354.25 U1.18 ; C9.2 v1(1899.2,164.2) ; C9.2@1860.78,156.43 cw(c1879.56,137.65) 1879.56,164.2 cw(c1879.56,190.76) C9.2@1860.78,171.98 ; v1@1890.9,155.9 ccw(c1870.84,135.84) 1870.84,164.2 ccw(c1870.84,192.57) v1@1890.9,172.51
RS: P4.5 U1.13 | length 420.1
  Bottom Layer w8: P4.5 1470.5,308.88 1496.13,283.25 1607.38,283.25 1653.38,237.25 1681.25,237.25 1724.75,280.75 U1.13 ; P4.5@1420.98,306.14 cw(c1427.6,299.53) 1427.6,308.88 cw(c1427.6,318.23) P4.5@1420.98,311.62
SCL: P4.4 U1.2 | length 660.9
  Top Layer w8: v1(1468,269) 1493.75,294.75 1493.75,421.75 ; v1@1468,280.75 ccw(c1468,309.11) 1488.06,289.06 ccw(c1508.11,269) v1@1479.75,269 ; v1@1495.9,431.14 cw(c1487.33,428.16) 1493.75,421.75 ; v1@1503.14,423.9 ccw(c1500.16,415.33) 1493.75,421.75 ; v1(1507,435) 1493.75,421.75
  Bottom Layer w8: P4.4 1455.68,281.32 v1(1468,269) ; P4.4@1420.98,278.58 cw(c1427.6,271.97) 1427.6,281.32 cw(c1427.6,290.68) P4.4@1420.98,284.06 ; v1(1507,435) 1550.88,478.88 1670.12,478.88 1709,440 U1.2 ; v1@1507,446.75 ccw(c1507,475.11) 1527.06,455.06 ccw(c1547.11,435) v1@1518.75,435
SCM_LINK: P3.4 R10.1 U1.11 | length 633
  Bottom Layer w8: U1.11 1756.24,278.76 1771,264 1800,264 1816,248 1816,120 ; P3.4@1807,67.45 ccw(c1785.26,89.19) 1816,89.19 ccw(c1846.74,89.19) P3.4@1825,67.45 ; P3.4 1816,120 ; 2023.81,148.81 cw(c2046,126.62) R10.1@2046,158 ; 2028.64,153.64 ccw(c2013.27,169) R10.1@2035,169 ; R10.1 2044,169 1995,120 1816,120
SCM_RST: P3.5 R5.2 R15.1 U1.10 | length 1446.1
  Top Layer w8: v1@1684.92,130.25 cw(c1684.92,101.89) 1704.97,121.94 cw(c1725.03,142) v1@1696.67,142 ; v1(1684.92,142) 1707.92,119 1824,119 1866,77 ; 1831.15,111.85 cw(c1777.74,58.45) P3.5@1853.27,58.45 ; 1844.8,98.2 cw(c1805.06,58.45) P3.5@1861.27,58.45 ; 1858.46,84.54 cw(c1832.37,58.45) P3.5@1869.27,58.45 ; P3.5@1861.42,70.33 ccw(c1858.85,77) 1866,77 ; P3.5 1866,77 ; P3.5@1870.58,70.33 cw(c1873.15,77) 1866,77
  Bottom Layer w8: R5.2@1652.78,141.16 cw(c1671.56,122.39) 1671.56,148.94 cw(c1671.56,175.5) R5.2@1652.78,156.72 ; 1662.09,148.94 cw(c1662.09,122.97) v1@1682.04,139.6 ; 1665.94,150.45 ccw(c1670.41,167.13) v1@1679.04,152.17 ; 1670.4,149.25 cw(c1665.79,132.05) v1@1681.59,140.27 ; v1@1675.89,134.48 ccw(c1645,108.73) R5.2 v1@1677.97,148.94 ; U1.10 1778.49,297.51 1791,285 1855,285 1929,211 2055,211 2077,189 2077,150 R15.1 2028,101 ; P3.5@1862.76,58.03 cw(c1886.45,61.07) 1869.56,77.96 ; P3.5 1866,74.4 1892.6,101 ; P3.5@1870.69,59.05 cw(c1906.87,63.69) 1881.08,89.48 ; P3.5@1878.63,60.07 cw(c1927.29,66.31) 1892.6,101 ; R15.1@2035.01,118.67 cw(c2011.06,117.94) 2028,101 ; R15.1@2045.67,108.01 ccw(c2044.94,84.06) 2028,101 ; R15.1@2046,130 ccw(c2046,156.56) 2064.78,137.78 ccw(c2083.56,119) R15.1@2057,119 ; 1892.6,101 2028,101
SDA: P4.3 U1.17 | length 631.9
  Top Layer w8: v1@1511.69,249.77 ccw(c1489.83,271.63) 1520.75,271.63 ; v1@1512.44,367.69 cw(c1492.39,347.64) 1520.75,347.64 cw(c1549.11,347.64) v1@1529.06,367.69 ; v1(1520,241.47) 1520.75,242.21 v1(1520.75,376) ; 1520.75,268.02 ccw(c1546.56,268.02) v1@1528.31,249.77
  Bottom Layer w8: P4.3 1443.19,253.76 1455.49,241.47 v1(1520,241.47) ; P4.3@1420.98,251.02 cw(c1427.6,244.41) 1427.6,253.76 cw(c1427.6,263.12) P4.3@1420.98,256.5 ; v1@1511.69,233.16 ccw(c1491.64,213.1) 1491.64,241.47 ccw(c1491.64,269.83) v1@1511.69,249.77 ; v1@1520.75,364.25 cw(c1520.75,335.89) 1540.8,355.94 cw(c1560.86,376) v1@1532.5,376 ; v1(1520.75,376) 1558.24,338.5 U1.17
U_RX: P3.2 U1.1 | length 904.3
  Top Layer w8: v1@1551.48,434.68 cw(c1537.18,431.81) 1547.5,421.5 ; v1@1560.68,425.48 ccw(c1557.81,411.18) 1547.5,421.5 ; v1(1563,437) 1547.5,421.5 ; 1691.05,87.95 cw(c1661.54,58.45) P3.2@1703.27,58.45 ; 1702.03,76.97 ccw(c1716,90.93) P3.2@1716,71.18 ; P3.2@1704.7,74.3 cw(c1688.86,58.45) P3.2@1711.27,58.45 ; P3.2 1716,63 1689,90 1590,90 1547.5,132.5 1547.5,421.5
  Bottom Layer w8: v1@1559.99,440.01 cw(c1584.73,415.27) 1584.73,450.25 ; v1(1563,437) 1576.25,450.25 1662.75,450.25 1693.25,419.75 U1.1 ; v1@1565.65,434.35 cw(c1604.04,395.96) 1604.04,450.25 ; v1@1571.31,428.69 cw(c1623.36,376.64) 1623.36,450.25
U_TX: P3.1 U1.19 | length 825.1
  Top Layer w8: v1@1511.07,168.69 cw(c1491.02,148.64) 1519.38,148.64 cw(c1547.74,148.64) v1@1527.69,168.69 ; v1(1519.38,177) 1519.38,117.52 1587.31,49.59 P3.1 ; v1@1592.69,259.31 ccw(c1572.64,279.36) 1601,279.36 ccw(c1629.36,279.36) v1@1609.31,259.31 ; v1@1605,251 1601,255 1601,328 1623.75,350.75 v1(1623.75,390.25) ; v1@1615.44,381.94 cw(c1595.39,361.89) 1623.75,361.89 cw(c1652.11,361.89) v1@1632.06,381.94 ; P3.1@1657,40.59 ccw(c1635.26,18.85) 1635.26,49.59 ccw(c1635.26,80.33) P3.1@1657,58.59
  Bottom Layer w8: v1@1512.37,186.43 ccw(c1501.99,200.38) 1519.38,200.38 ; v1(1519.38,177) 1519.38,200.38 ; v1@1526.39,186.43 cw(c1536.76,200.38) 1519.38,200.38 ; v1@1592.69,242.69 ccw(c1572.64,222.64) 1572.64,251 ccw(c1572.64,279.36) v1@1592.69,259.31 ; v1(1601,251) 1570,251 1519.38,200.38 ; v1(1623.75,390.25) 1644,370 U1.19
V_IN: C1.2 L1.1 R3.1 R7.2 S3.3 | length 2340.3
  Bottom Layer w10: 151.03,481.74 151.03,549.03 198,596 447,596 527,676 1534,676 1582,628 1632.43,628 R7.2 ; C1.2@212.93,642.93 cw(c195.86,625.86) 220,625.86 cw(c244.14,625.86) C1.2@227.07,642.93 ; 220,597 C1.2 ; R3.1@633.93,583.07 ccw(c616.86,600.14) 641,600.14 ccw(c665.14,600.14) R3.1@648.07,583.07 ; R3.1 641,675 ; R7.2@1648.16,602.27 ccw(c1624.02,602.27) 1641.09,619.34 ccw(c1658.16,636.41) R7.2@1658.16,612.27
  Bottom Layer w20: S3.3 151.03,481.74 151.03,361.97 199,314 L1.1 ; S3.3@104.37,472.11 cw(c127.63,448.85) 127.63,481.74 cw(c127.63,514.63) S3.3@104.37,491.37 ; 155.17,357.83 cw(c111.33,314) L1.1@173.32,314 ; L1.1@174.77,338.23 ccw(c190.88,354.35) L1.1@190.88,331.56
pads on no net: P3.3 P4.1 P4.2 P4.9 S3.S1 S3.S2 U3.5 U3.6 U3.10

## Polygon pours and split planes (outlines as drawn)
GND on Bottom Layer "BOT_GND" (solid, remove dead copper, pour order 5): 31,75.42 ccw(c81,75.42) 81,25.42 2343.2,25.42 ccw(c2343.2,75.42) 2393.2,75.42 2393.2,652.58 ccw(c2343.2,652.58) 2343.2,702.58 81,702.58 ccw(c81,652.58) 31,652.58
GND on Top Layer "TOP_GND" (solid, remove dead copper, pour order 2): 31,75.42 ccw(c81,75.42) 81,25.42 2343.2,25.42 ccw(c2343.2,75.42) 2393.2,75.42 2393.2,652.58 ccw(c2343.2,652.58) 2343.2,702.58 81,702.58 ccw(c81,652.58) 31,652.58

## Other copper
Top Layer:
  region net 3V0: 1605,516 1605,609.22 1569,609.22 1569,516
  rectangle net 3V0: 1586,644 1679.22,680
  pour cut-out: 352.3,347.46 145.46,347.46 133,335 133,140 148,125 346,125 361,140 361,338.76
Bottom Layer:
  region net 3V0: 1605,516 1605,609.22 1569,609.22 1569,516
  rectangle net 3V0: 1586,644 1679.22,680
  pour cut-out: 352.3,347.46 145.46,347.46 133,335 133,140 148,125 346,125 361,140 361,338.76

## Silkscreen, mask and mechanical layers (free items; w line width, h text height)
Top Overlay:
  lines w5: 2081,364 2112,364 ; 2096.5,348.5 2096.5,379.5 ; 899.35,88.41 2001.71,88.41 2001.71,639.59 899.35,639.59 899.35,88.41
  text "3V3" at 2332.45,501.8 h40
  text "MODE" at 542,469 h60
  text "DA" at 2339,409 h40
  text "CLK" at 2325.71,302 h40
  text "RST" at 2330,202.51 h40
  text "HOLD" at 541,189 h60
  text "GND" at 2328.71,83.36 h40
Bottom Overlay:
  rectangle: 2186,541 2236,567
  text "2020.03.08" at 1048,652 h50
  text "SCM_XDM_V100" at 1424,649 h50
  text "B1" at 1239,44 h50
  text "B2" at 1305,44 h50
  text "B3" at 1368,43 h50
  text "B4" at 1432,42 h50
  text "NC" at 1504,41 h50
  text "G" at 1554,40 h50
  text "V" at 1597,40 h50
Mechanical 1:
  lines w5: 899.35,108.09 871.79,108.09 871.79,619.91 899.35,619.91 ; 899.35,108.69 899.35,620.5 ; 31,75.42 ccw(c81,75.42) 81,25.42 2343.2,25.42 ccw(c2343.2,75.42) 2393.2,75.42 2393.2,652.58 ccw(c2343.2,652.58) 2343.2,702.58 81,702.58 ccw(c81,652.58) 31,652.58 31,75.42
Mechanical 11:
  lines w5: 645.21,589.59 1191.67,589.59

## Text inside footprints (layer, text, board x,y; h text height)
P4: Bottom Overlay "1" at 1436.75,188.65 h50 r270